# EAGLE board untitled (EAGLE 5.06), part 1 of 8
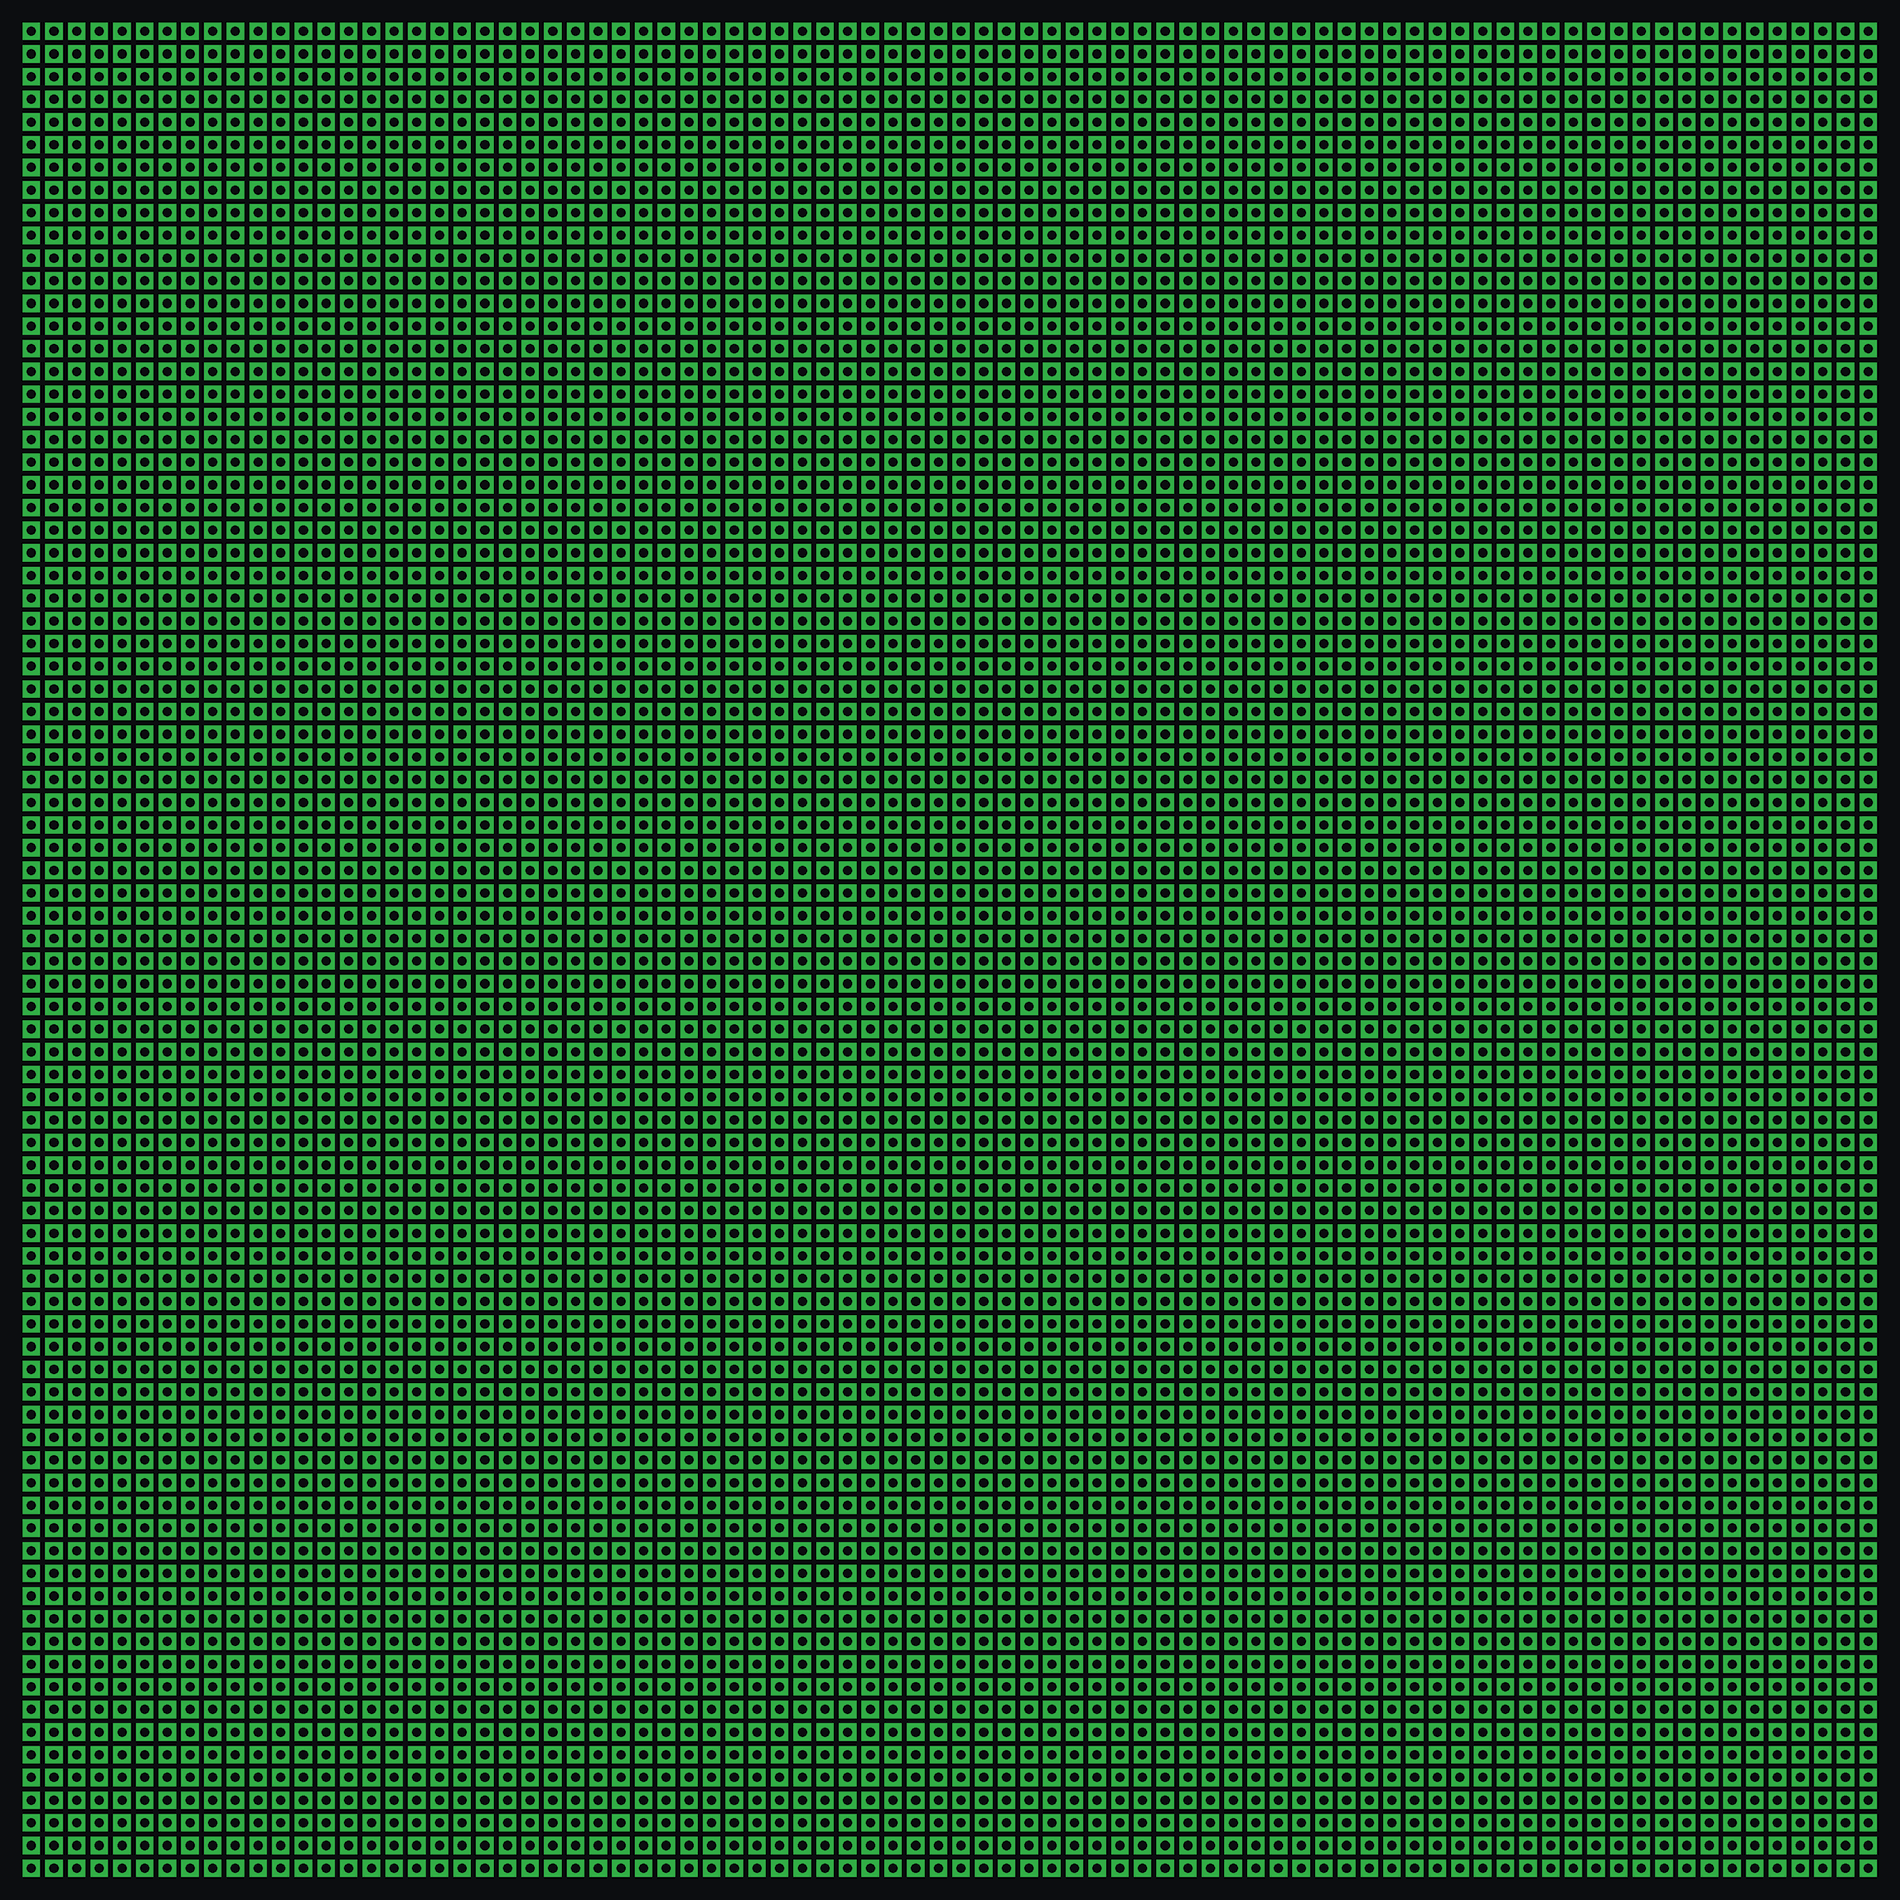
[diagram p0: board, top side]

No outline drawn. Coordinates in mm, seen from the top.
Copper layers (1*16): Top 0.035mm / dielectric 1.5mm / Bottom 0.035mm
Design rules "default": minimum track width 10mil, minimum drill 24mil, track to track 8mil, track to pad 8mil, pad to pad 8mil, via to via 8mil, smd to smd 8mil, copper to edge 40mil, drill to drill 8mil, minimum pad ring 10mil, minimum via ring 8mil, stop-mask expansion 4mil, vias tented up to drill 0mil, thermal gap 10mil

## Placement (x,y rotation side)

## Tracks (layer width: path | path; a pad name or v marks a point on that pad's centre or on a via)
S$1  (via drill 1 pad 1.9)
  other vias: 2.5,202.5
S$2  (via drill 1 pad 1.9)
  other vias: 5,202.5
S$3  (via drill 1 pad 1.9)
  other vias: 7.5,202.5
S$4  (via drill 1 pad 1.9)
  other vias: 10,202.5
S$5  (via drill 1 pad 1.9)
  other vias: 12.5,202.5
S$7  (via drill 1 pad 1.9)
  other vias: 15,202.5
S$8  (via drill 1 pad 1.9)
  other vias: 17.5,202.5
S$9  (via drill 1 pad 1.9)
  other vias: 20,202.5
S$10  (via drill 1 pad 1.9)
  other vias: 22.5,202.5
S$11  (via drill 1 pad 1.9)
  other vias: 25,202.5
S$12  (via drill 1 pad 1.9)
  other vias: 27.5,202.5
S$13  (via drill 1 pad 1.9)
  other vias: 30,202.5
S$14  (via drill 1 pad 1.9)
  other vias: 32.5,202.5
S$15  (via drill 1 pad 1.9)
  other vias: 35,202.5
S$16  (via drill 1 pad 1.9)
  other vias: 37.5,202.5
S$17  (via drill 1 pad 1.9)
  other vias: 40,202.5
S$18  (via drill 1 pad 1.9)
  other vias: 42.5,202.5
S$19  (via drill 1 pad 1.9)
  other vias: 45,202.5
S$20  (via drill 1 pad 1.9)
  other vias: 47.5,202.5
S$21  (via drill 1 pad 1.9)
  other vias: 50,202.5
S$22  (via drill 1 pad 1.9)
  other vias: 52.5,202.5
S$23  (via drill 1 pad 1.9)
  other vias: 55,202.5
S$24  (via drill 1 pad 1.9)
  other vias: 57.5,202.5
S$25  (via drill 1 pad 1.9)
  other vias: 60,202.5
S$26  (via drill 1 pad 1.9)
  other vias: 62.5,202.5
S$27  (via drill 1 pad 1.9)
  other vias: 65,202.5
S$28  (via drill 1 pad 1.9)
  other vias: 67.5,202.5
S$29  (via drill 1 pad 1.9)
  other vias: 70,202.5
S$30  (via drill 1 pad 1.9)
  other vias: 72.5,202.5
S$31  (via drill 1 pad 1.9)
  other vias: 75,202.5
S$32  (via drill 1 pad 1.9)
  other vias: 77.5,202.5
S$33  (via drill 1 pad 1.9)
  other vias: 80,202.5
S$34  (via drill 1 pad 1.9)
  other vias: 82.5,202.5
S$35  (via drill 1 pad 1.9)
  other vias: 85,202.5
S$36  (via drill 1 pad 1.9)
  other vias: 87.5,202.5
S$37  (via drill 1 pad 1.9)
  other vias: 90,202.5
S$38  (via drill 1 pad 1.9)
  other vias: 92.5,202.5
S$39  (via drill 1 pad 1.9)
  other vias: 95,202.5
S$40  (via drill 1 pad 1.9)
  other vias: 97.5,202.5
S$41  (via drill 1 pad 1.9)
  other vias: 100,202.5
S$42  (via drill 1 pad 1.9)
  other vias: 102.5,202.5
S$43  (via drill 1 pad 1.9)
  other vias: 105,202.5
S$44  (via drill 1 pad 1.9)
  other vias: 107.5,202.5
S$45  (via drill 1 pad 1.9)
  other vias: 110,202.5
S$46  (via drill 1 pad 1.9)
  other vias: 112.5,202.5
S$47  (via drill 1 pad 1.9)
  other vias: 115,202.5
S$48  (via drill 1 pad 1.9)
  other vias: 117.5,202.5
S$49  (via drill 1 pad 1.9)
  other vias: 120,202.5
S$50  (via drill 1 pad 1.9)
  other vias: 122.5,202.5
S$51  (via drill 1 pad 1.9)
  other vias: 125,202.5
S$52  (via drill 1 pad 1.9)
  other vias: 127.5,202.5
S$53  (via drill 1 pad 1.9)
  other vias: 130,202.5
S$54  (via drill 1 pad 1.9)
  other vias: 132.5,202.5
S$55  (via drill 1 pad 1.9)
  other vias: 135,202.5
S$56  (via drill 1 pad 1.9)
  other vias: 137.5,202.5
S$57  (via drill 1 pad 1.9)
  other vias: 140,202.5
S$58  (via drill 1 pad 1.9)
  other vias: 142.5,202.5
S$59  (via drill 1 pad 1.9)
  other vias: 145,202.5
S$60  (via drill 1 pad 1.9)
  other vias: 147.5,202.5
S$61  (via drill 1 pad 1.9)
  other vias: 150,202.5
S$62  (via drill 1 pad 1.9)
  other vias: 152.5,202.5
S$63  (via drill 1 pad 1.9)
  other vias: 155,202.5
S$64  (via drill 1 pad 1.9)
  other vias: 157.5,202.5
S$65  (via drill 1 pad 1.9)
  other vias: 160,202.5
S$66  (via drill 1 pad 1.9)
  other vias: 162.5,202.5
S$67  (via drill 1 pad 1.9)
  other vias: 165,202.5
S$68  (via drill 1 pad 1.9)
  other vias: 167.5,202.5
S$69  (via drill 1 pad 1.9)
  other vias: 170,202.5
S$70  (via drill 1 pad 1.9)
  other vias: 172.5,202.5
S$71  (via drill 1 pad 1.9)
  other vias: 175,202.5
S$72  (via drill 1 pad 1.9)
  other vias: 177.5,202.5
S$73  (via drill 1 pad 1.9)
  other vias: 180,202.5
S$74  (via drill 1 pad 1.9)
  other vias: 182.5,202.5
S$75  (via drill 1 pad 1.9)
  other vias: 185,202.5
S$76  (via drill 1 pad 1.9)
  other vias: 187.5,202.5
S$77  (via drill 1 pad 1.9)
  other vias: 190,202.5
S$78  (via drill 1 pad 1.9)
  other vias: 192.5,202.5
S$79  (via drill 1 pad 1.9)
  other vias: 195,202.5
S$80  (via drill 1 pad 1.9)
  other vias: 197.5,202.5
S$86  (via drill 1 pad 1.9)
  other vias: 2.5,200
S$87  (via drill 1 pad 1.9)
  other vias: 2.5,197.5
S$88  (via drill 1 pad 1.9)
  other vias: 5,197.5
S$89  (via drill 1 pad 1.9)
  other vias: 5,200
S$90  (via drill 1 pad 1.9)
  other vias: 7.5,200
S$91  (via drill 1 pad 1.9)
  other vias: 10,200
S$92  (via drill 1 pad 1.9)
  other vias: 12.5,200
S$93  (via drill 1 pad 1.9)
  other vias: 15,200
S$94  (via drill 1 pad 1.9)
  other vias: 15,197.5
S$95  (via drill 1 pad 1.9)
  other vias: 12.5,197.5
S$96  (via drill 1 pad 1.9)
  other vias: 10,197.5
S$97  (via drill 1 pad 1.9)
  other vias: 7.5,197.5
S$98  (via drill 1 pad 1.9)
  other vias: 2.5,195
S$99  (via drill 1 pad 1.9)
  other vias: 5,195
S$100  (via drill 1 pad 1.9)
  other vias: 7.5,195
S$101  (via drill 1 pad 1.9)
  other vias: 10,195
S$102  (via drill 1 pad 1.9)
  other vias: 12.5,195
S$103  (via drill 1 pad 1.9)
  other vias: 15,195
S$104  (via drill 1 pad 1.9)
  other vias: 15,192.5
S$105  (via drill 1 pad 1.9)
  other vias: 12.5,192.5
S$106  (via drill 1 pad 1.9)
  other vias: 10,192.5
S$107  (via drill 1 pad 1.9)
  other vias: 7.5,192.5
S$108  (via drill 1 pad 1.9)
  other vias: 5,192.5
S$109  (via drill 1 pad 1.9)
  other vias: 2.5,192.5
S$110  (via drill 1 pad 1.9)
  other vias: 2.5,190
S$111  (via drill 1 pad 1.9)
  other vias: 5,190
S$112  (via drill 1 pad 1.9)
  other vias: 7.5,190
S$113  (via drill 1 pad 1.9)
  other vias: 10,190
S$114  (via drill 1 pad 1.9)
  other vias: 12.5,190
S$115  (via drill 1 pad 1.9)
  other vias: 15,190
S$116  (via drill 1 pad 1.9)
  other vias: 15,187.5
S$117  (via drill 1 pad 1.9)
  other vias: 12.5,187.5
S$118  (via drill 1 pad 1.9)
  other vias: 10,187.5
S$119  (via drill 1 pad 1.9)
  other vias: 5,187.5
S$120  (via drill 1 pad 1.9)
  other vias: 2.5,187.5
S$121  (via drill 1 pad 1.9)
  other vias: 7.5,187.5
S$122  (via drill 1 pad 1.9)
  other vias: 5,185
S$123  (via drill 1 pad 1.9)
  other vias: 2.5,185
S$124  (via drill 1 pad 1.9)
  other vias: 7.5,185
S$125  (via drill 1 pad 1.9)
  other vias: 10,185
S$126  (via drill 1 pad 1.9)
  other vias: 12.5,185
S$127  (via drill 1 pad 1.9)
  other vias: 15,185
S$128  (via drill 1 pad 1.9)
  other vias: 15,182.5
S$129  (via drill 1 pad 1.9)
  other vias: 12.5,182.5
S$130  (via drill 1 pad 1.9)
  other vias: 10,182.5
S$131  (via drill 1 pad 1.9)
  other vias: 7.5,182.5
S$132  (via drill 1 pad 1.9)
  other vias: 5,182.5
S$133  (via drill 1 pad 1.9)
  other vias: 2.5,182.5
S$134  (via drill 1 pad 1.9)
  other vias: 2.5,180
S$135  (via drill 1 pad 1.9)
  other vias: 5,180
S$136  (via drill 1 pad 1.9)
  other vias: 7.5,180
S$137  (via drill 1 pad 1.9)
  other vias: 10,180
S$138  (via drill 1 pad 1.9)
  other vias: 12.5,180
S$139  (via drill 1 pad 1.9)
  other vias: 15,180
S$140  (via drill 1 pad 1.9)
  other vias: 17.5,200
S$141  (via drill 1 pad 1.9)
  other vias: 17.5,197.5
S$142  (via drill 1 pad 1.9)
  other vias: 20,197.5
S$143  (via drill 1 pad 1.9)
  other vias: 20,200
S$144  (via drill 1 pad 1.9)
  other vias: 22.5,200
S$145  (via drill 1 pad 1.9)
  other vias: 25,200
S$146  (via drill 1 pad 1.9)
  other vias: 27.5,200
S$147  (via drill 1 pad 1.9)
  other vias: 30,200
S$148  (via drill 1 pad 1.9)
  other vias: 30,197.5
S$149  (via drill 1 pad 1.9)
  other vias: 27.5,197.5
S$150  (via drill 1 pad 1.9)
  other vias: 25,197.5
S$151  (via drill 1 pad 1.9)
  other vias: 22.5,197.5
S$152  (via drill 1 pad 1.9)
  other vias: 17.5,195
S$153  (via drill 1 pad 1.9)
  other vias: 20,195
S$154  (via drill 1 pad 1.9)
  other vias: 22.5,195
S$155  (via drill 1 pad 1.9)
  other vias: 25,195
S$156  (via drill 1 pad 1.9)
  other vias: 27.5,195
S$157  (via drill 1 pad 1.9)
  other vias: 30,195
S$158  (via drill 1 pad 1.9)
  other vias: 30,192.5
S$159  (via drill 1 pad 1.9)
  other vias: 27.5,192.5
S$160  (via drill 1 pad 1.9)
  other vias: 25,192.5
S$161  (via drill 1 pad 1.9)
  other vias: 22.5,192.5
S$162  (via drill 1 pad 1.9)
  other vias: 200,202.5
S$163  (via drill 1 pad 1.9)
  other vias: 20,192.5
S$164  (via drill 1 pad 1.9)
  other vias: 17.5,192.5
S$165  (via drill 1 pad 1.9)
  other vias: 17.5,190
S$166  (via drill 1 pad 1.9)
  other vias: 20,190
S$167  (via drill 1 pad 1.9)
  other vias: 22.5,190
S$169  (via drill 1 pad 1.9)
  other vias: 25,190
S$170  (via drill 1 pad 1.9)
  other vias: 27.5,190
S$171  (via drill 1 pad 1.9)
  other vias: 30,190
S$172  (via drill 1 pad 1.9)
  other vias: 30,187.5
S$173  (via drill 1 pad 1.9)
  other vias: 27.5,187.5
S$174  (via drill 1 pad 1.9)
  other vias: 25,187.5
S$175  (via drill 1 pad 1.9)
  other vias: 20,187.5
S$176  (via drill 1 pad 1.9)
  other vias: 17.5,187.5
S$177  (via drill 1 pad 1.9)
  other vias: 22.5,187.5
S$178  (via drill 1 pad 1.9)
  other vias: 20,185
S$179  (via drill 1 pad 1.9)
  other vias: 17.5,185
S$180  (via drill 1 pad 1.9)
  other vias: 22.5,185
S$181  (via drill 1 pad 1.9)
  other vias: 25,185
S$182  (via drill 1 pad 1.9)
  other vias: 27.5,185
S$183  (via drill 1 pad 1.9)
  other vias: 30,185
S$184  (via drill 1 pad 1.9)
  other vias: 30,182.5
S$185  (via drill 1 pad 1.9)
  other vias: 27.5,182.5
S$186  (via drill 1 pad 1.9)
  other vias: 25,182.5
S$187  (via drill 1 pad 1.9)
  other vias: 22.5,182.5
S$188  (via drill 1 pad 1.9)
  other vias: 20,182.5
S$189  (via drill 1 pad 1.9)
  other vias: 17.5,182.5
S$190  (via drill 1 pad 1.9)
  other vias: 17.5,180
S$191  (via drill 1 pad 1.9)
  other vias: 20,180
S$192  (via drill 1 pad 1.9)
  other vias: 22.5,180
S$193  (via drill 1 pad 1.9)
  other vias: 25,180
S$194  (via drill 1 pad 1.9)
  other vias: 27.5,180
S$195  (via drill 1 pad 1.9)
  other vias: 30,180
S$196  (via drill 1 pad 1.9)
  other vias: 2.5,177.5
S$197  (via drill 1 pad 1.9)
  other vias: 2.5,175
S$198  (via drill 1 pad 1.9)
  other vias: 5,175
S$199  (via drill 1 pad 1.9)
  other vias: 5,177.5
S$200  (via drill 1 pad 1.9)
  other vias: 7.5,177.5
S$201  (via drill 1 pad 1.9)
  other vias: 10,177.5
S$202  (via drill 1 pad 1.9)
  other vias: 12.5,177.5
S$203  (via drill 1 pad 1.9)
  other vias: 15,177.5
S$204  (via drill 1 pad 1.9)
  other vias: 15,175
S$205  (via drill 1 pad 1.9)
  other vias: 12.5,175
S$206  (via drill 1 pad 1.9)
  other vias: 10,175
S$207  (via drill 1 pad 1.9)
  other vias: 7.5,175
S$208  (via drill 1 pad 1.9)
  other vias: 2.5,172.5
S$209  (via drill 1 pad 1.9)
  other vias: 5,172.5
S$210  (via drill 1 pad 1.9)
  other vias: 7.5,172.5
S$211  (via drill 1 pad 1.9)
  other vias: 10,172.5
S$212  (via drill 1 pad 1.9)
  other vias: 12.5,172.5
S$213  (via drill 1 pad 1.9)
  other vias: 15,172.5
S$214  (via drill 1 pad 1.9)
  other vias: 15,170
S$215  (via drill 1 pad 1.9)
  other vias: 12.5,170
S$216  (via drill 1 pad 1.9)
  other vias: 10,170
S$217  (via drill 1 pad 1.9)
  other vias: 7.5,170
S$218  (via drill 1 pad 1.9)
  other vias: 5,170
S$219  (via drill 1 pad 1.9)
  other vias: 2.5,170
S$220  (via drill 1 pad 1.9)
  other vias: 2.5,167.5
S$221  (via drill 1 pad 1.9)
  other vias: 5,167.5
S$222  (via drill 1 pad 1.9)
  other vias: 7.5,167.5
S$223  (via drill 1 pad 1.9)
  other vias: 10,167.5
S$224  (via drill 1 pad 1.9)
  other vias: 12.5,167.5
S$225  (via drill 1 pad 1.9)
  other vias: 15,167.5
S$226  (via drill 1 pad 1.9)
  other vias: 15,165
S$227  (via drill 1 pad 1.9)
  other vias: 12.5,165
S$228  (via drill 1 pad 1.9)
  other vias: 10,165
S$229  (via drill 1 pad 1.9)
  other vias: 5,165
S$230  (via drill 1 pad 1.9)
  other vias: 2.5,165
S$231  (via drill 1 pad 1.9)
  other vias: 7.5,165
S$232  (via drill 1 pad 1.9)
  other vias: 5,162.5
S$233  (via drill 1 pad 1.9)
  other vias: 2.5,162.5
S$234  (via drill 1 pad 1.9)
  other vias: 7.5,162.5
S$235  (via drill 1 pad 1.9)
  other vias: 10,162.5
S$236  (via drill 1 pad 1.9)
  other vias: 12.5,162.5
S$237  (via drill 1 pad 1.9)
  other vias: 15,162.5
S$238  (via drill 1 pad 1.9)
  other vias: 15,160
S$239  (via drill 1 pad 1.9)
  other vias: 2.5,0
S$240  (via drill 1 pad 1.9)
  other vias: 12.5,160
S$241  (via drill 1 pad 1.9)
  other vias: 10,160
S$242  (via drill 1 pad 1.9)
  other vias: 7.5,160
S$243  (via drill 1 pad 1.9)
  other vias: 5,160
S$244  (via drill 1 pad 1.9)
  other vias: 2.5,160
S$245  (via drill 1 pad 1.9)
  other vias: 2.5,157.5
S$246  (via drill 1 pad 1.9)
  other vias: 5,157.5
S$247  (via drill 1 pad 1.9)
  other vias: 7.5,157.5
S$248  (via drill 1 pad 1.9)
  other vias: 10,157.5
S$249  (via drill 1 pad 1.9)
  other vias: 12.5,157.5
S$250  (via drill 1 pad 1.9)
  other vias: 15,157.5
S$251  (via drill 1 pad 1.9)
  other vias: 17.5,177.5
S$252  (via drill 1 pad 1.9)
  other vias: 17.5,175
S$253  (via drill 1 pad 1.9)
  other vias: 20,175
S$254  (via drill 1 pad 1.9)
  other vias: 20,177.5
S$255  (via drill 1 pad 1.9)
  other vias: 22.5,177.5
S$256  (via drill 1 pad 1.9)
  other vias: 25,177.5
S$257  (via drill 1 pad 1.9)
  other vias: 27.5,177.5
S$258  (via drill 1 pad 1.9)
  other vias: 30,177.5
S$259  (via drill 1 pad 1.9)
  other vias: 30,175
S$260  (via drill 1 pad 1.9)
  other vias: 27.5,175
S$261  (via drill 1 pad 1.9)
  other vias: 25,175
S$262  (via drill 1 pad 1.9)
  other vias: 22.5,175
S$263  (via drill 1 pad 1.9)
  other vias: 17.5,172.5
S$264  (via drill 1 pad 1.9)
  other vias: 20,172.5
S$265  (via drill 1 pad 1.9)
  other vias: 22.5,172.5
S$266  (via drill 1 pad 1.9)
  other vias: 25,172.5
S$267  (via drill 1 pad 1.9)
  other vias: 27.5,172.5
S$268  (via drill 1 pad 1.9)
  other vias: 30,172.5
S$269  (via drill 1 pad 1.9)
  other vias: 30,170
S$270  (via drill 1 pad 1.9)
  other vias: 27.5,170
S$271  (via drill 1 pad 1.9)
  other vias: 25,170
S$272  (via drill 1 pad 1.9)
  other vias: 22.5,170
S$273  (via drill 1 pad 1.9)
  other vias: 20,170
S$274  (via drill 1 pad 1.9)
  other vias: 17.5,170
S$275  (via drill 1 pad 1.9)
  other vias: 17.5,167.5
S$276  (via drill 1 pad 1.9)
  other vias: 20,167.5
S$277  (via drill 1 pad 1.9)
  other vias: 22.5,167.5
S$278  (via drill 1 pad 1.9)
  other vias: 25,167.5
S$279  (via drill 1 pad 1.9)
  other vias: 27.5,167.5
S$280  (via drill 1 pad 1.9)
  other vias: 5,0
S$281  (via drill 1 pad 1.9)
  other vias: 30,167.5
S$282  (via drill 1 pad 1.9)
  other vias: 30,165
S$283  (via drill 1 pad 1.9)
  other vias: 27.5,165
S$284  (via drill 1 pad 1.9)
  other vias: 25,165
S$285  (via drill 1 pad 1.9)
  other vias: 20,165
S$286  (via drill 1 pad 1.9)
  other vias: 17.5,165
S$287  (via drill 1 pad 1.9)
  other vias: 22.5,165
S$288  (via drill 1 pad 1.9)
  other vias: 20,162.5
S$289  (via drill 1 pad 1.9)
  other vias: 17.5,162.5
S$290  (via drill 1 pad 1.9)
  other vias: 22.5,162.5
S$291  (via drill 1 pad 1.9)
  other vias: 25,162.5
S$292  (via drill 1 pad 1.9)
  other vias: 27.5,162.5
S$293  (via drill 1 pad 1.9)
  other vias: 30,162.5
S$294  (via drill 1 pad 1.9)
  other vias: 30,160
S$295  (via drill 1 pad 1.9)
  other vias: 27.5,160
S$296  (via drill 1 pad 1.9)
  other vias: 25,160
S$297  (via drill 1 pad 1.9)
  other vias: 22.5,160
S$298  (via drill 1 pad 1.9)
  other vias: 20,160
S$299  (via drill 1 pad 1.9)
  other vias: 17.5,160
S$300  (via drill 1 pad 1.9)
  other vias: 17.5,157.5
S$301  (via drill 1 pad 1.9)
  other vias: 20,157.5
S$302  (via drill 1 pad 1.9)
  other vias: 22.5,157.5
S$303  (via drill 1 pad 1.9)
  other vias: 25,157.5
S$304  (via drill 1 pad 1.9)
  other vias: 27.5,157.5
S$305  (via drill 1 pad 1.9)
  other vias: 30,157.5
S$306  (via drill 1 pad 1.9)
  other vias: 32.5,200
S$307  (via drill 1 pad 1.9)
  other vias: 32.5,197.5
S$308  (via drill 1 pad 1.9)
  other vias: 35,197.5
S$309  (via drill 1 pad 1.9)
  other vias: 35,200
S$310  (via drill 1 pad 1.9)
  other vias: 37.5,200
S$311  (via drill 1 pad 1.9)
  other vias: 40,200
S$312  (via drill 1 pad 1.9)
  other vias: 42.5,200
S$313  (via drill 1 pad 1.9)
  other vias: 45,200
S$314  (via drill 1 pad 1.9)
  other vias: 45,197.5
S$315  (via drill 1 pad 1.9)
  other vias: 7.5,0
S$316  (via drill 1 pad 1.9)
  other vias: 42.5,197.5
S$317  (via drill 1 pad 1.9)
  other vias: 40,197.5
S$318  (via drill 1 pad 1.9)
  other vias: 37.5,197.5
S$319  (via drill 1 pad 1.9)
  other vias: 32.5,195
S$320  (via drill 1 pad 1.9)
  other vias: 35,195
S$321  (via drill 1 pad 1.9)
  other vias: 37.5,195
S$322  (via drill 1 pad 1.9)
  other vias: 40,195
S$323  (via drill 1 pad 1.9)
  other vias: 42.5,195
S$324  (via drill 1 pad 1.9)
  other vias: 45,195
S$325  (via drill 1 pad 1.9)
  other vias: 45,192.5
S$326  (via drill 1 pad 1.9)
  other vias: 42.5,192.5
S$327  (via drill 1 pad 1.9)
  other vias: 40,192.5
S$328  (via drill 1 pad 1.9)
  other vias: 37.5,192.5
S$329  (via drill 1 pad 1.9)
  other vias: 35,192.5
S$330  (via drill 1 pad 1.9)
  other vias: 32.5,192.5
S$331  (via drill 1 pad 1.9)
  other vias: 32.5,190
S$332  (via drill 1 pad 1.9)
  other vias: 35,190
S$333  (via drill 1 pad 1.9)
  other vias: 37.5,190
S$334  (via drill 1 pad 1.9)
  other vias: 40,190
S$335  (via drill 1 pad 1.9)
  other vias: 42.5,190
S$336  (via drill 1 pad 1.9)
  other vias: 45,190
S$337  (via drill 1 pad 1.9)
  other vias: 45,187.5
S$338  (via drill 1 pad 1.9)
  other vias: 42.5,187.5
S$339  (via drill 1 pad 1.9)
  other vias: 40,187.5
S$340  (via drill 1 pad 1.9)
  other vias: 35,187.5
S$341  (via drill 1 pad 1.9)
  other vias: 32.5,187.5
S$342  (via drill 1 pad 1.9)
  other vias: 37.5,187.5
S$343  (via drill 1 pad 1.9)
  other vias: 35,185
S$344  (via drill 1 pad 1.9)
  other vias: 32.5,185
S$345  (via drill 1 pad 1.9)
  other vias: 37.5,185
S$346  (via drill 1 pad 1.9)
  other vias: 40,185
S$347  (via drill 1 pad 1.9)
  other vias: 42.5,185
S$348  (via drill 1 pad 1.9)
  other vias: 45,185
S$349  (via drill 1 pad 1.9)
  other vias: 45,182.5
S$350  (via drill 1 pad 1.9)
  other vias: 42.5,182.5
S$351  (via drill 1 pad 1.9)
  other vias: 40,182.5
S$352  (via drill 1 pad 1.9)
  other vias: 37.5,182.5
S$353  (via drill 1 pad 1.9)
  other vias: 35,182.5
S$354  (via drill 1 pad 1.9)
  other vias: 32.5,182.5
S$355  (via drill 1 pad 1.9)
  other vias: 32.5,180
S$356  (via drill 1 pad 1.9)
  other vias: 35,180
S$357  (via drill 1 pad 1.9)
  other vias: 37.5,180
S$358  (via drill 1 pad 1.9)
  other vias: 40,180
S$359  (via drill 1 pad 1.9)
  other vias: 42.5,180
S$360  (via drill 1 pad 1.9)
  other vias: 45,180
S$361  (via drill 1 pad 1.9)
  other vias: 47.5,200
S$362  (via drill 1 pad 1.9)
  other vias: 47.5,197.5
S$363  (via drill 1 pad 1.9)
  other vias: 50,197.5
S$364  (via drill 1 pad 1.9)
  other vias: 50,200
S$365  (via drill 1 pad 1.9)
  other vias: 52.5,200
S$366  (via drill 1 pad 1.9)
  other vias: 55,200
S$367  (via drill 1 pad 1.9)
  other vias: 57.5,200
S$368  (via drill 1 pad 1.9)
  other vias: 60,200
S$369  (via drill 1 pad 1.9)
  other vias: 60,197.5
S$370  (via drill 1 pad 1.9)
  other vias: 57.5,197.5
S$371  (via drill 1 pad 1.9)
  other vias: 55,197.5
S$372  (via drill 1 pad 1.9)
  other vias: 52.5,197.5
S$373  (via drill 1 pad 1.9)
  other vias: 47.5,195
S$374  (via drill 1 pad 1.9)
  other vias: 50,195
S$375  (via drill 1 pad 1.9)
  other vias: 52.5,195
S$376  (via drill 1 pad 1.9)
  other vias: 55,195
S$377  (via drill 1 pad 1.9)
  other vias: 57.5,195
S$378  (via drill 1 pad 1.9)
  other vias: 60,195
S$379  (via drill 1 pad 1.9)
  other vias: 60,192.5
S$380  (via drill 1 pad 1.9)
  other vias: 57.5,192.5
S$381  (via drill 1 pad 1.9)
  other vias: 55,192.5
S$382  (via drill 1 pad 1.9)
  other vias: 52.5,192.5
S$383  (via drill 1 pad 1.9)
  other vias: 50,192.5
S$384  (via drill 1 pad 1.9)
  other vias: 47.5,192.5
S$385  (via drill 1 pad 1.9)
  other vias: 47.5,190
S$386  (via drill 1 pad 1.9)
  other vias: 50,190
S$387  (via drill 1 pad 1.9)
  other vias: 52.5,190
S$388  (via drill 1 pad 1.9)
  other vias: 55,190
S$389  (via drill 1 pad 1.9)
  other vias: 57.5,190
S$390  (via drill 1 pad 1.9)
  other vias: 60,190
S$391  (via drill 1 pad 1.9)
  other vias: 60,187.5
S$392  (via drill 1 pad 1.9)
  other vias: 57.5,187.5
S$393  (via drill 1 pad 1.9)
  other vias: 55,187.5
S$394  (via drill 1 pad 1.9)
  other vias: 50,187.5
S$395  (via drill 1 pad 1.9)
  other vias: 47.5,187.5
S$396  (via drill 1 pad 1.9)
  other vias: 52.5,187.5
S$397  (via drill 1 pad 1.9)
  other vias: 50,185
S$398  (via drill 1 pad 1.9)
  other vias: 47.5,185
S$399  (via drill 1 pad 1.9)
  other vias: 52.5,185
S$400  (via drill 1 pad 1.9)
  other vias: 55,185
S$401  (via drill 1 pad 1.9)
  other vias: 57.5,185
S$402  (via drill 1 pad 1.9)
  other vias: 60,185
S$403  (via drill 1 pad 1.9)
  other vias: 60,182.5
S$404  (via drill 1 pad 1.9)
  other vias: 57.5,182.5
S$405  (via drill 1 pad 1.9)
  other vias: 55,182.5
S$406  (via drill 1 pad 1.9)
  other vias: 52.5,182.5
S$407  (via drill 1 pad 1.9)
  other vias: 50,182.5
S$408  (via drill 1 pad 1.9)
  other vias: 47.5,182.5
S$409  (via drill 1 pad 1.9)
  other vias: 47.5,180
S$410  (via drill 1 pad 1.9)
  other vias: 50,180
S$411  (via drill 1 pad 1.9)
  other vias: 52.5,180
S$412  (via drill 1 pad 1.9)
  other vias: 55,180
S$413  (via drill 1 pad 1.9)
  other vias: 57.5,180
S$414  (via drill 1 pad 1.9)
  other vias: 60,180
S$415  (via drill 1 pad 1.9)
  other vias: 32.5,177.5
S$416  (via drill 1 pad 1.9)
  other vias: 32.5,175
S$417  (via drill 1 pad 1.9)
  other vias: 35,175
S$418  (via drill 1 pad 1.9)
  other vias: 35,177.5
S$419  (via drill 1 pad 1.9)
  other vias: 37.5,177.5
S$420  (via drill 1 pad 1.9)
  other vias: 40,177.5
S$421  (via drill 1 pad 1.9)
  other vias: 42.5,177.5
S$422  (via drill 1 pad 1.9)
  other vias: 45,177.5
S$423  (via drill 1 pad 1.9)
  other vias: 45,175
S$424  (via drill 1 pad 1.9)
  other vias: 42.5,175
S$425  (via drill 1 pad 1.9)
  other vias: 40,175
S$426  (via drill 1 pad 1.9)
  other vias: 37.5,175
S$427  (via drill 1 pad 1.9)
  other vias: 32.5,172.5
S$428  (via drill 1 pad 1.9)
  other vias: 35,172.5
S$429  (via drill 1 pad 1.9)
  other vias: 37.5,172.5
S$430  (via drill 1 pad 1.9)
  other vias: 40,172.5
S$431  (via drill 1 pad 1.9)
  other vias: 42.5,172.5
S$432  (via drill 1 pad 1.9)
  other vias: 45,172.5
S$433  (via drill 1 pad 1.9)
  other vias: 45,170
S$434  (via drill 1 pad 1.9)
  other vias: 42.5,170
S$435  (via drill 1 pad 1.9)
  other vias: 40,170
S$436  (via drill 1 pad 1.9)
  other vias: 37.5,170
S$437  (via drill 1 pad 1.9)
  other vias: 35,170
S$438  (via drill 1 pad 1.9)
  other vias: 32.5,170
S$439  (via drill 1 pad 1.9)
  other vias: 32.5,167.5
S$440  (via drill 1 pad 1.9)
  other vias: 35,167.5
S$441  (via drill 1 pad 1.9)
  other vias: 37.5,167.5
S$442  (via drill 1 pad 1.9)
  other vias: 40,167.5
S$443  (via drill 1 pad 1.9)
  other vias: 42.5,167.5
S$444  (via drill 1 pad 1.9)
  other vias: 45,167.5
S$445  (via drill 1 pad 1.9)
  other vias: 45,165
S$446  (via drill 1 pad 1.9)
  other vias: 42.5,165
S$447  (via drill 1 pad 1.9)
  other vias: 40,165
S$448  (via drill 1 pad 1.9)
  other vias: 35,165
S$449  (via drill 1 pad 1.9)
  other vias: 32.5,165
S$450  (via drill 1 pad 1.9)
  other vias: 37.5,165
S$451  (via drill 1 pad 1.9)
  other vias: 35,162.5
S$452  (via drill 1 pad 1.9)
  other vias: 32.5,162.5
S$453  (via drill 1 pad 1.9)
  other vias: 37.5,162.5
S$454  (via drill 1 pad 1.9)
  other vias: 40,162.5
S$455  (via drill 1 pad 1.9)
  other vias: 42.5,162.5
S$456  (via drill 1 pad 1.9)
  other vias: 45,162.5
S$457  (via drill 1 pad 1.9)
  other vias: 45,160
S$458  (via drill 1 pad 1.9)
  other vias: 42.5,160
S$459  (via drill 1 pad 1.9)
  other vias: 40,160
S$460  (via drill 1 pad 1.9)
  other vias: 37.5,160
S$461  (via drill 1 pad 1.9)
  other vias: 35,160
S$462  (via drill 1 pad 1.9)
  other vias: 32.5,160
S$463  (via drill 1 pad 1.9)
  other vias: 32.5,157.5
S$464  (via drill 1 pad 1.9)
  other vias: 35,157.5
S$465  (via drill 1 pad 1.9)
  other vias: 37.5,157.5
S$466  (via drill 1 pad 1.9)
  other vias: 40,157.5
S$467  (via drill 1 pad 1.9)
  other vias: 42.5,157.5
S$468  (via drill 1 pad 1.9)
  other vias: 45,157.5
S$469  (via drill 1 pad 1.9)
  other vias: 47.5,177.5
S$470  (via drill 1 pad 1.9)
  other vias: 47.5,175
S$471  (via drill 1 pad 1.9)
  other vias: 50,175
S$472  (via drill 1 pad 1.9)
  other vias: 50,177.5
S$473  (via drill 1 pad 1.9)
  other vias: 52.5,177.5
S$474  (via drill 1 pad 1.9)
  other vias: 55,177.5
S$475  (via drill 1 pad 1.9)
  other vias: 57.5,177.5
S$476  (via drill 1 pad 1.9)
  other vias: 60,177.5
S$477  (via drill 1 pad 1.9)
  other vias: 60,175
S$478  (via drill 1 pad 1.9)
  other vias: 57.5,175
S$479  (via drill 1 pad 1.9)
  other vias: 55,175
S$480  (via drill 1 pad 1.9)
  other vias: 52.5,175
S$481  (via drill 1 pad 1.9)
  other vias: 47.5,172.5
S$482  (via drill 1 pad 1.9)
  other vias: 50,172.5
S$483  (via drill 1 pad 1.9)
  other vias: 52.5,172.5
S$484  (via drill 1 pad 1.9)
  other vias: 55,172.5
S$485  (via drill 1 pad 1.9)
  other vias: 57.5,172.5
S$486  (via drill 1 pad 1.9)
  other vias: 60,172.5
S$487  (via drill 1 pad 1.9)
  other vias: 60,170
S$488  (via drill 1 pad 1.9)
  other vias: 57.5,170
S$489  (via drill 1 pad 1.9)
  other vias: 55,170
S$490  (via drill 1 pad 1.9)
  other vias: 52.5,170
S$491  (via drill 1 pad 1.9)
  other vias: 50,170
S$492  (via drill 1 pad 1.9)
  other vias: 47.5,170
S$493  (via drill 1 pad 1.9)
  other vias: 47.5,167.5
S$494  (via drill 1 pad 1.9)
  other vias: 50,167.5
S$495  (via drill 1 pad 1.9)
  other vias: 52.5,167.5
S$496  (via drill 1 pad 1.9)
  other vias: 55,167.5
S$497  (via drill 1 pad 1.9)
  other vias: 57.5,167.5
S$498  (via drill 1 pad 1.9)
  other vias: 60,167.5
S$499  (via drill 1 pad 1.9)
  other vias: 60,165
S$500  (via drill 1 pad 1.9)
  other vias: 57.5,165
S$501  (via drill 1 pad 1.9)
  other vias: 55,165
S$502  (via drill 1 pad 1.9)
  other vias: 50,165
S$503  (via drill 1 pad 1.9)
  other vias: 47.5,165
S$504  (via drill 1 pad 1.9)
  other vias: 52.5,165
S$505  (via drill 1 pad 1.9)
  other vias: 50,162.5
S$506  (via drill 1 pad 1.9)
  other vias: 47.5,162.5
S$507  (via drill 1 pad 1.9)
  other vias: 52.5,162.5
S$508  (via drill 1 pad 1.9)
  other vias: 55,162.5
S$509  (via drill 1 pad 1.9)
  other vias: 57.5,162.5
S$510  (via drill 1 pad 1.9)
  other vias: 60,162.5
S$511  (via drill 1 pad 1.9)
  other vias: 60,160
S$512  (via drill 1 pad 1.9)
  other vias: 57.5,160
S$513  (via drill 1 pad 1.9)
  other vias: 55,160
S$514  (via drill 1 pad 1.9)
  other vias: 52.5,160
S$515  (via drill 1 pad 1.9)
  other vias: 50,160
S$516  (via drill 1 pad 1.9)
  other vias: 47.5,160
S$517  (via drill 1 pad 1.9)
  other vias: 47.5,157.5
S$518  (via drill 1 pad 1.9)
  other vias: 50,157.5
S$519  (via drill 1 pad 1.9)
  other vias: 52.5,157.5
S$520  (via drill 1 pad 1.9)
  other vias: 55,157.5
S$521  (via drill 1 pad 1.9)
  other vias: 57.5,157.5
S$522  (via drill 1 pad 1.9)
  other vias: 60,157.5
S$523  (via drill 1 pad 1.9)
  other vias: 62.5,200
S$524  (via drill 1 pad 1.9)
  other vias: 62.5,197.5
S$525  (via drill 1 pad 1.9)
  other vias: 65,197.5
S$526  (via drill 1 pad 1.9)
  other vias: 65,200
S$527  (via drill 1 pad 1.9)
  other vias: 67.5,200
S$528  (via drill 1 pad 1.9)
  other vias: 70,200
S$529  (via drill 1 pad 1.9)
  other vias: 72.5,200
S$530  (via drill 1 pad 1.9)
  other vias: 75,200
S$531  (via drill 1 pad 1.9)
  other vias: 75,197.5
S$532  (via drill 1 pad 1.9)
  other vias: 72.5,197.5
S$533  (via drill 1 pad 1.9)
  other vias: 70,197.5
S$534  (via drill 1 pad 1.9)
  other vias: 67.5,197.5
S$535  (via drill 1 pad 1.9)
  other vias: 62.5,195
S$536  (via drill 1 pad 1.9)
  other vias: 65,195
S$537  (via drill 1 pad 1.9)
  other vias: 67.5,195
S$538  (via drill 1 pad 1.9)
  other vias: 70,195
S$539  (via drill 1 pad 1.9)
  other vias: 72.5,195
S$540  (via drill 1 pad 1.9)
  other vias: 75,195
S$541  (via drill 1 pad 1.9)
  other vias: 75,192.5
S$542  (via drill 1 pad 1.9)
  other vias: 72.5,192.5
S$543  (via drill 1 pad 1.9)
  other vias: 70,192.5
S$544  (via drill 1 pad 1.9)
  other vias: 67.5,192.5
S$545  (via drill 1 pad 1.9)
  other vias: 65,192.5
S$546  (via drill 1 pad 1.9)
  other vias: 62.5,192.5
S$547  (via drill 1 pad 1.9)
  other vias: 62.5,190
S$548  (via drill 1 pad 1.9)
  other vias: 65,190
S$549  (via drill 1 pad 1.9)
  other vias: 67.5,190
S$550  (via drill 1 pad 1.9)
  other vias: 70,190
S$551  (via drill 1 pad 1.9)
  other vias: 72.5,190
S$552  (via drill 1 pad 1.9)
  other vias: 75,190
S$553  (via drill 1 pad 1.9)
  other vias: 75,187.5
S$554  (via drill 1 pad 1.9)
  other vias: 72.5,187.5
S$555  (via drill 1 pad 1.9)
  other vias: 70,187.5
S$556  (via drill 1 pad 1.9)
  other vias: 65,187.5
S$557  (via drill 1 pad 1.9)
  other vias: 62.5,187.5
S$558  (via drill 1 pad 1.9)
  other vias: 67.5,187.5
S$559  (via drill 1 pad 1.9)
  other vias: 65,185
S$560  (via drill 1 pad 1.9)
  other vias: 62.5,185
S$561  (via drill 1 pad 1.9)
  other vias: 67.5,185
S$562  (via drill 1 pad 1.9)
  other vias: 70,185
S$563  (via drill 1 pad 1.9)
  other vias: 72.5,185
S$564  (via drill 1 pad 1.9)
  other vias: 75,185
S$565  (via drill 1 pad 1.9)
  other vias: 75,182.5
S$566  (via drill 1 pad 1.9)
  other vias: 72.5,182.5
S$567  (via drill 1 pad 1.9)
  other vias: 70,182.5
S$568  (via drill 1 pad 1.9)
  other vias: 67.5,182.5
S$569  (via drill 1 pad 1.9)
  other vias: 65,182.5
S$570  (via drill 1 pad 1.9)
  other vias: 62.5,182.5
S$571  (via drill 1 pad 1.9)
  other vias: 62.5,180
S$572  (via drill 1 pad 1.9)
  other vias: 65,180
S$573  (via drill 1 pad 1.9)
  other vias: 67.5,180
S$574  (via drill 1 pad 1.9)
  other vias: 70,180
S$575  (via drill 1 pad 1.9)
  other vias: 72.5,180
S$576  (via drill 1 pad 1.9)
  other vias: 75,180
S$577  (via drill 1 pad 1.9)
  other vias: 77.5,200
S$578  (via drill 1 pad 1.9)
  other vias: 77.5,197.5
S$579  (via drill 1 pad 1.9)
  other vias: 80,197.5
S$580  (via drill 1 pad 1.9)
  other vias: 80,200
S$581  (via drill 1 pad 1.9)
  other vias: 82.5,200
S$582  (via drill 1 pad 1.9)
  other vias: 85,200
S$583  (via drill 1 pad 1.9)
  other vias: 87.5,200
S$584  (via drill 1 pad 1.9)
  other vias: 90,200
S$585  (via drill 1 pad 1.9)
  other vias: 90,197.5
S$586  (via drill 1 pad 1.9)
  other vias: 87.5,197.5
S$587  (via drill 1 pad 1.9)
  other vias: 85,197.5
S$588  (via drill 1 pad 1.9)
  other vias: 82.5,197.5
S$589  (via drill 1 pad 1.9)
  other vias: 77.5,195
S$590  (via drill 1 pad 1.9)
  other vias: 80,195
S$591  (via drill 1 pad 1.9)
  other vias: 82.5,195
S$592  (via drill 1 pad 1.9)
  other vias: 85,195
S$593  (via drill 1 pad 1.9)
  other vias: 87.5,195
S$594  (via drill 1 pad 1.9)
  other vias: 90,195
S$595  (via drill 1 pad 1.9)
  other vias: 90,192.5
S$596  (via drill 1 pad 1.9)
  other vias: 87.5,192.5
S$597  (via drill 1 pad 1.9)
  other vias: 85,192.5
S$598  (via drill 1 pad 1.9)
  other vias: 82.5,192.5
S$599  (via drill 1 pad 1.9)
  other vias: 80,192.5
S$600  (via drill 1 pad 1.9)
  other vias: 77.5,192.5
S$601  (via drill 1 pad 1.9)
  other vias: 77.5,190
S$602  (via drill 1 pad 1.9)
  other vias: 80,190
S$603  (via drill 1 pad 1.9)
  other vias: 82.5,190
S$604  (via drill 1 pad 1.9)
  other vias: 85,190
S$605  (via drill 1 pad 1.9)
  other vias: 87.5,190
S$606  (via drill 1 pad 1.9)
  other vias: 90,190
S$607  (via drill 1 pad 1.9)
  other vias: 90,187.5
S$608  (via drill 1 pad 1.9)
  other vias: 87.5,187.5
S$609  (via drill 1 pad 1.9)
  other vias: 85,187.5
S$610  (via drill 1 pad 1.9)
  other vias: 80,187.5
S$611  (via drill 1 pad 1.9)
  other vias: 77.5,187.5
S$612  (via drill 1 pad 1.9)
  other vias: 82.5,187.5
S$613  (via drill 1 pad 1.9)
  other vias: 80,185
S$614  (via drill 1 pad 1.9)
  other vias: 77.5,185
S$615  (via drill 1 pad 1.9)
  other vias: 82.5,185
S$616  (via drill 1 pad 1.9)
  other vias: 85,185
S$617  (via drill 1 pad 1.9)
  other vias: 87.5,185
S$618  (via drill 1 pad 1.9)
  other vias: 90,185
S$619  (via drill 1 pad 1.9)
  other vias: 90,182.5
S$620  (via drill 1 pad 1.9)
  other vias: 87.5,182.5
S$621  (via drill 1 pad 1.9)
  other vias: 85,182.5
S$622  (via drill 1 pad 1.9)
  other vias: 82.5,182.5
S$623  (via drill 1 pad 1.9)
  other vias: 80,182.5
S$624  (via drill 1 pad 1.9)
  other vias: 77.5,182.5
S$625  (via drill 1 pad 1.9)
  other vias: 77.5,180
S$626  (via drill 1 pad 1.9)
  other vias: 80,180
S$627  (via drill 1 pad 1.9)
  other vias: 82.5,180
S$628  (via drill 1 pad 1.9)
  other vias: 85,180
S$629  (via drill 1 pad 1.9)
  other vias: 87.5,180
S$630  (via drill 1 pad 1.9)
  other vias: 90,180
S$631  (via drill 1 pad 1.9)
  other vias: 62.5,177.5
S$632  (via drill 1 pad 1.9)
  other vias: 62.5,175
S$633  (via drill 1 pad 1.9)
  other vias: 65,175
S$634  (via drill 1 pad 1.9)
  other vias: 65,177.5
S$635  (via drill 1 pad 1.9)
  other vias: 67.5,177.5
S$636  (via drill 1 pad 1.9)
  other vias: 70,177.5
S$637  (via drill 1 pad 1.9)
  other vias: 72.5,177.5
S$638  (via drill 1 pad 1.9)
  other vias: 75,177.5
S$639  (via drill 1 pad 1.9)
  other vias: 75,175
S$640  (via drill 1 pad 1.9)
  other vias: 72.5,175
S$641  (via drill 1 pad 1.9)
  other vias: 70,175
S$642  (via drill 1 pad 1.9)
  other vias: 67.5,175
S$643  (via drill 1 pad 1.9)
  other vias: 62.5,172.5
S$644  (via drill 1 pad 1.9)
  other vias: 65,172.5
S$645  (via drill 1 pad 1.9)
  other vias: 67.5,172.5
S$646  (via drill 1 pad 1.9)
  other vias: 70,172.5
S$647  (via drill 1 pad 1.9)
  other vias: 72.5,172.5
S$648  (via drill 1 pad 1.9)
  other vias: 75,172.5
S$649  (via drill 1 pad 1.9)
  other vias: 75,170
S$650  (via drill 1 pad 1.9)
  other vias: 72.5,170
S$651  (via drill 1 pad 1.9)
  other vias: 70,170
S$652  (via drill 1 pad 1.9)
  other vias: 67.5,170
S$653  (via drill 1 pad 1.9)
  other vias: 65,170
S$654  (via drill 1 pad 1.9)
  other vias: 62.5,170
S$655  (via drill 1 pad 1.9)
  other vias: 62.5,167.5
S$656  (via drill 1 pad 1.9)
  other vias: 65,167.5
S$657  (via drill 1 pad 1.9)
  other vias: 67.5,167.5
S$658  (via drill 1 pad 1.9)
  other vias: 70,167.5
S$659  (via drill 1 pad 1.9)
  other vias: 72.5,167.5
S$660  (via drill 1 pad 1.9)
  other vias: 75,167.5
S$661  (via drill 1 pad 1.9)
  other vias: 75,165
S$662  (via drill 1 pad 1.9)
  other vias: 72.5,165
S$663  (via drill 1 pad 1.9)
  other vias: 70,165
S$664  (via drill 1 pad 1.9)
  other vias: 65,165
S$665  (via drill 1 pad 1.9)
  other vias: 62.5,165
S$666  (via drill 1 pad 1.9)
  other vias: 67.5,165
S$667  (via drill 1 pad 1.9)
  other vias: 65,162.5
S$668  (via drill 1 pad 1.9)
  other vias: 62.5,162.5
S$669  (via drill 1 pad 1.9)
  other vias: 67.5,162.5
S$670  (via drill 1 pad 1.9)
  other vias: 70,162.5
S$671  (via drill 1 pad 1.9)
  other vias: 72.5,162.5
S$672  (via drill 1 pad 1.9)
  other vias: 75,162.5
S$673  (via drill 1 pad 1.9)
  other vias: 75,160
S$674  (via drill 1 pad 1.9)
  other vias: 72.5,160
S$675  (via drill 1 pad 1.9)
  other vias: 70,160
S$676  (via drill 1 pad 1.9)
  other vias: 67.5,160
S$677  (via drill 1 pad 1.9)
  other vias: 65,160
S$678  (via drill 1 pad 1.9)
  other vias: 62.5,160
S$679  (via drill 1 pad 1.9)
  other vias: 62.5,157.5
S$680  (via drill 1 pad 1.9)
  other vias: 65,157.5
S$681  (via drill 1 pad 1.9)
  other vias: 67.5,157.5
S$682  (via drill 1 pad 1.9)
  other vias: 70,157.5
S$683  (via drill 1 pad 1.9)
  other vias: 72.5,157.5
S$684  (via drill 1 pad 1.9)
  other vias: 75,157.5
S$685  (via drill 1 pad 1.9)
  other vias: 77.5,177.5
S$686  (via drill 1 pad 1.9)
  other vias: 77.5,175
S$687  (via drill 1 pad 1.9)
  other vias: 80,175
S$688  (via drill 1 pad 1.9)
  other vias: 80,177.5
S$689  (via drill 1 pad 1.9)
  other vias: 82.5,177.5
S$690  (via drill 1 pad 1.9)
  other vias: 85,177.5
S$691  (via drill 1 pad 1.9)
  other vias: 87.5,177.5
S$692  (via drill 1 pad 1.9)
  other vias: 90,177.5
S$693  (via drill 1 pad 1.9)
  other vias: 90,175
S$694  (via drill 1 pad 1.9)
  other vias: 87.5,175
S$695  (via drill 1 pad 1.9)
  other vias: 85,175
S$696  (via drill 1 pad 1.9)
  other vias: 82.5,175
S$697  (via drill 1 pad 1.9)
  other vias: 77.5,172.5
S$698  (via drill 1 pad 1.9)
  other vias: 80,172.5
S$699  (via drill 1 pad 1.9)
  other vias: 82.5,172.5
S$700  (via drill 1 pad 1.9)
  other vias: 85,172.5
S$701  (via drill 1 pad 1.9)
  other vias: 87.5,172.5
S$702  (via drill 1 pad 1.9)
  other vias: 90,172.5
S$703  (via drill 1 pad 1.9)
  other vias: 90,170
S$704  (via drill 1 pad 1.9)
  other vias: 87.5,170
S$705  (via drill 1 pad 1.9)
  other vias: 85,170
S$706  (via drill 1 pad 1.9)
  other vias: 82.5,170
S$707  (via drill 1 pad 1.9)
  other vias: 80,170
S$708  (via drill 1 pad 1.9)
  other vias: 77.5,170
S$709  (via drill 1 pad 1.9)
  other vias: 77.5,167.5
S$710  (via drill 1 pad 1.9)
  other vias: 80,167.5
S$711  (via drill 1 pad 1.9)
  other vias: 82.5,167.5
S$712  (via drill 1 pad 1.9)
  other vias: 85,167.5
S$713  (via drill 1 pad 1.9)
  other vias: 87.5,167.5
S$714  (via drill 1 pad 1.9)
  other vias: 90,167.5
S$715  (via drill 1 pad 1.9)
  other vias: 90,165
S$716  (via drill 1 pad 1.9)
  other vias: 87.5,165
S$717  (via drill 1 pad 1.9)
  other vias: 85,165
S$718  (via drill 1 pad 1.9)
  other vias: 80,165
S$719  (via drill 1 pad 1.9)
  other vias: 77.5,165
S$720  (via drill 1 pad 1.9)
  other vias: 82.5,165
S$721  (via drill 1 pad 1.9)
  other vias: 80,162.5
S$722  (via drill 1 pad 1.9)
  other vias: 77.5,162.5
S$723  (via drill 1 pad 1.9)
  other vias: 82.5,162.5
S$724  (via drill 1 pad 1.9)
  other vias: 85,162.5
S$725  (via drill 1 pad 1.9)
  other vias: 87.5,162.5
S$726  (via drill 1 pad 1.9)
  other vias: 90,162.5
S$727  (via drill 1 pad 1.9)
  other vias: 90,160
S$728  (via drill 1 pad 1.9)
  other vias: 87.5,160
S$729  (via drill 1 pad 1.9)
  other vias: 85,160
S$730  (via drill 1 pad 1.9)
  other vias: 82.5,160
S$731  (via drill 1 pad 1.9)
  other vias: 80,160
S$732  (via drill 1 pad 1.9)
  other vias: 77.5,160
S$733  (via drill 1 pad 1.9)
  other vias: 77.5,157.5
S$734  (via drill 1 pad 1.9)
  other vias: 80,157.5
S$735  (via drill 1 pad 1.9)
  other vias: 82.5,157.5
S$736  (via drill 1 pad 1.9)
  other vias: 85,157.5
S$737  (via drill 1 pad 1.9)
  other vias: 87.5,157.5
S$738  (via drill 1 pad 1.9)
  other vias: 90,157.5
S$739  (via drill 1 pad 1.9)
  other vias: 92.5,200
S$740  (via drill 1 pad 1.9)
  other vias: 92.5,197.5
S$741  (via drill 1 pad 1.9)
  other vias: 95,197.5
S$742  (via drill 1 pad 1.9)
  other vias: 95,200
S$743  (via drill 1 pad 1.9)
  other vias: 97.5,200
S$744  (via drill 1 pad 1.9)
  other vias: 100,200
S$745  (via drill 1 pad 1.9)
  other vias: 102.5,200
S$746  (via drill 1 pad 1.9)
  other vias: 105,200
S$747  (via drill 1 pad 1.9)
  other vias: 105,197.5
S$748  (via drill 1 pad 1.9)
  other vias: 102.5,197.5
S$749  (via drill 1 pad 1.9)
  other vias: 100,197.5
S$750  (via drill 1 pad 1.9)
  other vias: 97.5,197.5
S$751  (via drill 1 pad 1.9)
  other vias: 92.5,195
S$752  (via drill 1 pad 1.9)
  other vias: 95,195
S$753  (via drill 1 pad 1.9)
  other vias: 97.5,195
S$754  (via drill 1 pad 1.9)
  other vias: 100,195
S$755  (via drill 1 pad 1.9)
  other vias: 102.5,195
S$756  (via drill 1 pad 1.9)
  other vias: 105,195
S$757  (via drill 1 pad 1.9)
  other vias: 105,192.5
S$758  (via drill 1 pad 1.9)
  other vias: 102.5,192.5
S$759  (via drill 1 pad 1.9)
  other vias: 100,192.5
S$760  (via drill 1 pad 1.9)
  other vias: 97.5,192.5
S$761  (via drill 1 pad 1.9)
  other vias: 95,192.5
S$762  (via drill 1 pad 1.9)
  other vias: 92.5,192.5
S$763  (via drill 1 pad 1.9)
  other vias: 92.5,190
S$764  (via drill 1 pad 1.9)
  other vias: 95,190
S$765  (via drill 1 pad 1.9)
  other vias: 97.5,190
S$766  (via drill 1 pad 1.9)
  other vias: 100,190
S$767  (via drill 1 pad 1.9)
  other vias: 102.5,190
S$768  (via drill 1 pad 1.9)
  other vias: 105,190
S$769  (via drill 1 pad 1.9)
  other vias: 105,187.5
S$770  (via drill 1 pad 1.9)
  other vias: 102.5,187.5
S$771  (via drill 1 pad 1.9)
  other vias: 100,187.5
S$772  (via drill 1 pad 1.9)
  other vias: 95,187.5
S$773  (via drill 1 pad 1.9)
  other vias: 92.5,187.5
S$774  (via drill 1 pad 1.9)
  other vias: 97.5,187.5
S$775  (via drill 1 pad 1.9)
  other vias: 95,185
S$776  (via drill 1 pad 1.9)
  other vias: 92.5,185
S$777  (via drill 1 pad 1.9)
  other vias: 97.5,185
S$778  (via drill 1 pad 1.9)
  other vias: 100,185
S$779  (via drill 1 pad 1.9)
  other vias: 102.5,185
S$780  (via drill 1 pad 1.9)
  other vias: 105,185
S$781  (via drill 1 pad 1.9)
  other vias: 105,182.5
S$782  (via drill 1 pad 1.9)
  other vias: 102.5,182.5
S$783  (via drill 1 pad 1.9)
  other vias: 100,182.5
S$784  (via drill 1 pad 1.9)
  other vias: 97.5,182.5
S$785  (via drill 1 pad 1.9)
  other vias: 95,182.5
S$786  (via drill 1 pad 1.9)
  other vias: 92.5,182.5
S$787  (via drill 1 pad 1.9)
  other vias: 92.5,180
S$788  (via drill 1 pad 1.9)
  other vias: 95,180
S$789  (via drill 1 pad 1.9)
  other vias: 97.5,180
S$790  (via drill 1 pad 1.9)
  other vias: 100,180
S$791  (via drill 1 pad 1.9)
  other vias: 102.5,180
S$792  (via drill 1 pad 1.9)
  other vias: 105,180
S$793  (via drill 1 pad 1.9)
  other vias: 107.5,200
S$794  (via drill 1 pad 1.9)
  other vias: 107.5,197.5
S$795  (via drill 1 pad 1.9)
  other vias: 110,197.5
S$796  (via drill 1 pad 1.9)
  other vias: 110,200
S$797  (via drill 1 pad 1.9)
  other vias: 112.5,200
S$798  (via drill 1 pad 1.9)
  other vias: 115,200
S$799  (via drill 1 pad 1.9)
  other vias: 117.5,200
S$800  (via drill 1 pad 1.9)
  other vias: 120,200
S$801  (via drill 1 pad 1.9)
  other vias: 120,197.5
S$802  (via drill 1 pad 1.9)
  other vias: 117.5,197.5
S$803  (via drill 1 pad 1.9)
  other vias: 115,197.5
S$804  (via drill 1 pad 1.9)
  other vias: 112.5,197.5
S$805  (via drill 1 pad 1.9)
  other vias: 107.5,195
S$806  (via drill 1 pad 1.9)
  other vias: 110,195
S$807  (via drill 1 pad 1.9)
  other vias: 112.5,195
S$808  (via drill 1 pad 1.9)
  other vias: 115,195
S$809  (via drill 1 pad 1.9)
  other vias: 117.5,195
S$810  (via drill 1 pad 1.9)
  other vias: 120,195
S$811  (via drill 1 pad 1.9)
  other vias: 120,192.5
S$812  (via drill 1 pad 1.9)
  other vias: 117.5,192.5
S$813  (via drill 1 pad 1.9)
  other vias: 115,192.5
S$814  (via drill 1 pad 1.9)
  other vias: 112.5,192.5
S$815  (via drill 1 pad 1.9)
  other vias: 110,192.5
S$816  (via drill 1 pad 1.9)
  other vias: 107.5,192.5
S$817  (via drill 1 pad 1.9)
  other vias: 107.5,190
S$818  (via drill 1 pad 1.9)
  other vias: 110,190
S$819  (via drill 1 pad 1.9)
  other vias: 112.5,190
S$820  (via drill 1 pad 1.9)
  other vias: 115,190
S$821  (via drill 1 pad 1.9)
  other vias: 117.5,190
S$822  (via drill 1 pad 1.9)
  other vias: 120,190
S$823  (via drill 1 pad 1.9)
  other vias: 120,187.5
S$824  (via drill 1 pad 1.9)
  other vias: 117.5,187.5
S$825  (via drill 1 pad 1.9)
  other vias: 115,187.5
S$826  (via drill 1 pad 1.9)
  other vias: 110,187.5
S$827  (via drill 1 pad 1.9)
  other vias: 107.5,187.5
S$828  (via drill 1 pad 1.9)
  other vias: 112.5,187.5
S$829  (via drill 1 pad 1.9)
  other vias: 110,185
S$830  (via drill 1 pad 1.9)
  other vias: 107.5,185
S$831  (via drill 1 pad 1.9)
  other vias: 112.5,185
S$832  (via drill 1 pad 1.9)
  other vias: 115,185
S$833  (via drill 1 pad 1.9)
  other vias: 117.5,185
S$834  (via drill 1 pad 1.9)
  other vias: 120,185
S$835  (via drill 1 pad 1.9)
  other vias: 120,182.5
S$836  (via drill 1 pad 1.9)
  other vias: 117.5,182.5
S$837  (via drill 1 pad 1.9)
  other vias: 115,182.5
S$838  (via drill 1 pad 1.9)
  other vias: 112.5,182.5
S$839  (via drill 1 pad 1.9)
  other vias: 110,182.5
S$840  (via drill 1 pad 1.9)
  other vias: 107.5,182.5
S$841  (via drill 1 pad 1.9)
  other vias: 107.5,180
S$842  (via drill 1 pad 1.9)
  other vias: 110,180
S$843  (via drill 1 pad 1.9)
  other vias: 112.5,180
S$844  (via drill 1 pad 1.9)
  other vias: 115,180
S$845  (via drill 1 pad 1.9)
  other vias: 117.5,180
S$846  (via drill 1 pad 1.9)
  other vias: 120,180
S$847  (via drill 1 pad 1.9)
  other vias: 92.5,177.5
S$848  (via drill 1 pad 1.9)
  other vias: 92.5,175
S$849  (via drill 1 pad 1.9)
  other vias: 95,175
S$850  (via drill 1 pad 1.9)
  other vias: 95,177.5
S$851  (via drill 1 pad 1.9)
  other vias: 97.5,177.5
S$852  (via drill 1 pad 1.9)
  other vias: 100,177.5
S$853  (via drill 1 pad 1.9)
  other vias: 102.5,177.5
S$854  (via drill 1 pad 1.9)
  other vias: 105,177.5
S$855  (via drill 1 pad 1.9)
  other vias: 105,175
S$856  (via drill 1 pad 1.9)
  other vias: 102.5,175
S$857  (via drill 1 pad 1.9)
  other vias: 100,175
S$858  (via drill 1 pad 1.9)
  other vias: 97.5,175
S$859  (via drill 1 pad 1.9)
  other vias: 92.5,172.5
S$860  (via drill 1 pad 1.9)
  other vias: 95,172.5
S$861  (via drill 1 pad 1.9)
  other vias: 97.5,172.5
S$862  (via drill 1 pad 1.9)
  other vias: 100,172.5
S$863  (via drill 1 pad 1.9)
  other vias: 102.5,172.5
S$864  (via drill 1 pad 1.9)
  other vias: 105,172.5
S$865  (via drill 1 pad 1.9)
  other vias: 105,170
S$866  (via drill 1 pad 1.9)
  other vias: 102.5,170
S$867  (via drill 1 pad 1.9)
  other vias: 100,170
S$868  (via drill 1 pad 1.9)
  other vias: 97.5,170
S$869  (via drill 1 pad 1.9)
  other vias: 95,170
S$870  (via drill 1 pad 1.9)
  other vias: 92.5,170
S$871  (via drill 1 pad 1.9)
  other vias: 92.5,167.5
S$872  (via drill 1 pad 1.9)
  other vias: 95,167.5
S$873  (via drill 1 pad 1.9)
  other vias: 97.5,167.5
S$874  (via drill 1 pad 1.9)
  other vias: 100,167.5
S$875  (via drill 1 pad 1.9)
  other vias: 102.5,167.5
S$876  (via drill 1 pad 1.9)
  other vias: 105,167.5
S$877  (via drill 1 pad 1.9)
  other vias: 105,165
S$878  (via drill 1 pad 1.9)
  other vias: 102.5,165
S$879  (via drill 1 pad 1.9)
  other vias: 100,165
S$880  (via drill 1 pad 1.9)
  other vias: 95,165
S$881  (via drill 1 pad 1.9)
  other vias: 92.5,165
S$882  (via drill 1 pad 1.9)
  other vias: 97.5,165
S$883  (via drill 1 pad 1.9)
  other vias: 95,162.5
S$884  (via drill 1 pad 1.9)
  other vias: 92.5,162.5
S$885  (via drill 1 pad 1.9)
  other vias: 97.5,162.5
S$886  (via drill 1 pad 1.9)
  other vias: 100,162.5
S$887  (via drill 1 pad 1.9)
  other vias: 102.5,162.5
S$888  (via drill 1 pad 1.9)
  other vias: 105,162.5
S$889  (via drill 1 pad 1.9)
  other vias: 105,160
S$890  (via drill 1 pad 1.9)
  other vias: 102.5,160
S$891  (via drill 1 pad 1.9)
  other vias: 100,160
S$892  (via drill 1 pad 1.9)
  other vias: 97.5,160
S$893  (via drill 1 pad 1.9)
  other vias: 95,160
S$894  (via drill 1 pad 1.9)
  other vias: 92.5,160
S$895  (via drill 1 pad 1.9)
  other vias: 92.5,157.5
S$896  (via drill 1 pad 1.9)
  other vias: 95,157.5
S$897  (via drill 1 pad 1.9)
  other vias: 97.5,157.5
S$898  (via drill 1 pad 1.9)
  other vias: 100,157.5
S$899  (via drill 1 pad 1.9)
  other vias: 102.5,157.5
S$900  (via drill 1 pad 1.9)
  other vias: 105,157.5
S$901  (via drill 1 pad 1.9)
  other vias: 107.5,177.5
S$902  (via drill 1 pad 1.9)
  other vias: 107.5,175
S$903  (via drill 1 pad 1.9)
  other vias: 110,175
S$904  (via drill 1 pad 1.9)
  other vias: 110,177.5
S$905  (via drill 1 pad 1.9)
  other vias: 112.5,177.5
S$906  (via drill 1 pad 1.9)
  other vias: 115,177.5
S$907  (via drill 1 pad 1.9)
  other vias: 117.5,177.5
S$908  (via drill 1 pad 1.9)
  other vias: 120,177.5
S$909  (via drill 1 pad 1.9)
  other vias: 120,175
S$910  (via drill 1 pad 1.9)
  other vias: 117.5,175
S$911  (via drill 1 pad 1.9)
  other vias: 115,175
S$912  (via drill 1 pad 1.9)
  other vias: 112.5,175
S$913  (via drill 1 pad 1.9)
  other vias: 107.5,172.5
S$914  (via drill 1 pad 1.9)
  other vias: 110,172.5
S$915  (via drill 1 pad 1.9)
  other vias: 112.5,172.5
S$916  (via drill 1 pad 1.9)
  other vias: 115,172.5
S$917  (via drill 1 pad 1.9)
  other vias: 117.5,172.5
S$918  (via drill 1 pad 1.9)
  other vias: 120,172.5
S$919  (via drill 1 pad 1.9)
  other vias: 120,170
S$920  (via drill 1 pad 1.9)
  other vias: 117.5,170
S$921  (via drill 1 pad 1.9)
  other vias: 115,170
S$922  (via drill 1 pad 1.9)
  other vias: 112.5,170
S$923  (via drill 1 pad 1.9)
  other vias: 110,170
S$924  (via drill 1 pad 1.9)
  other vias: 107.5,170
S$925  (via drill 1 pad 1.9)
  other vias: 107.5,167.5
S$926  (via drill 1 pad 1.9)
  other vias: 110,167.5
S$927  (via drill 1 pad 1.9)
  other vias: 112.5,167.5
S$928  (via drill 1 pad 1.9)
  other vias: 115,167.5
S$929  (via drill 1 pad 1.9)
  other vias: 117.5,167.5
S$930  (via drill 1 pad 1.9)
  other vias: 120,167.5
S$931  (via drill 1 pad 1.9)
  other vias: 120,165
S$932  (via drill 1 pad 1.9)
  other vias: 117.5,165
S$933  (via drill 1 pad 1.9)
  other vias: 115,165
S$934  (via drill 1 pad 1.9)
  other vias: 110,165
S$935  (via drill 1 pad 1.9)
  other vias: 107.5,165
S$936  (via drill 1 pad 1.9)
  other vias: 112.5,165
S$937  (via drill 1 pad 1.9)
  other vias: 110,162.5
S$938  (via drill 1 pad 1.9)
  other vias: 107.5,162.5
S$939  (via drill 1 pad 1.9)
  other vias: 112.5,162.5
S$940  (via drill 1 pad 1.9)
  other vias: 115,162.5
S$941  (via drill 1 pad 1.9)
  other vias: 117.5,162.5
S$942  (via drill 1 pad 1.9)
  other vias: 120,162.5
S$943  (via drill 1 pad 1.9)
  other vias: 120,160
S$944  (via drill 1 pad 1.9)
  other vias: 117.5,160
S$945  (via drill 1 pad 1.9)
  other vias: 115,160
S$946  (via drill 1 pad 1.9)
  other vias: 112.5,160
S$947  (via drill 1 pad 1.9)
  other vias: 110,160
S$948  (via drill 1 pad 1.9)
  other vias: 107.5,160
S$949  (via drill 1 pad 1.9)